# Altium PCB imu-extend.PcbDoc
Units mm, origin at the board's own origin, x right, y up, seen from the top; angles counter-clockwise.
Board outline 16 x 16 mm, 2 copper layers (Top Layer, Bottom Layer); 2 components, 10 nets, 20 pads, 1 vias.
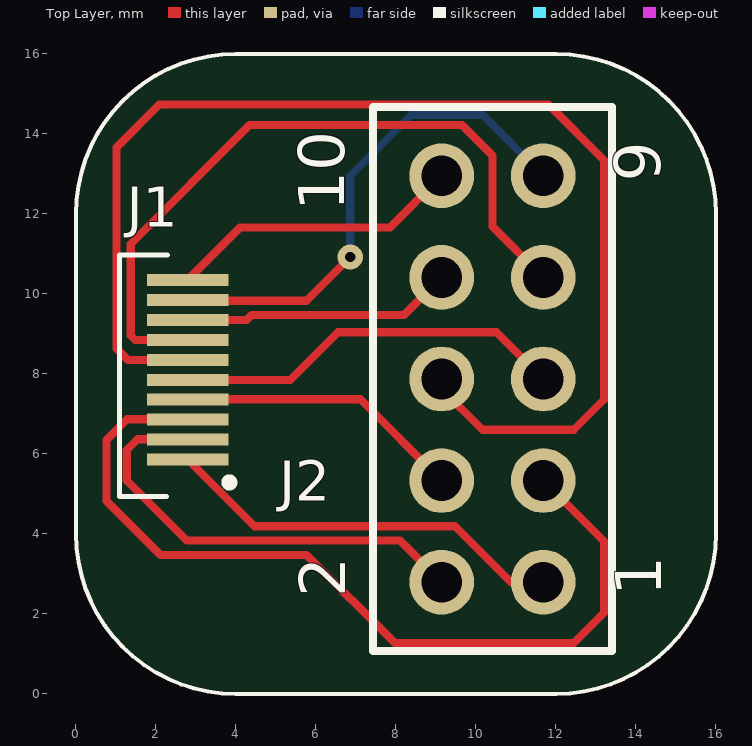
[diagram p0: Top Layer view]
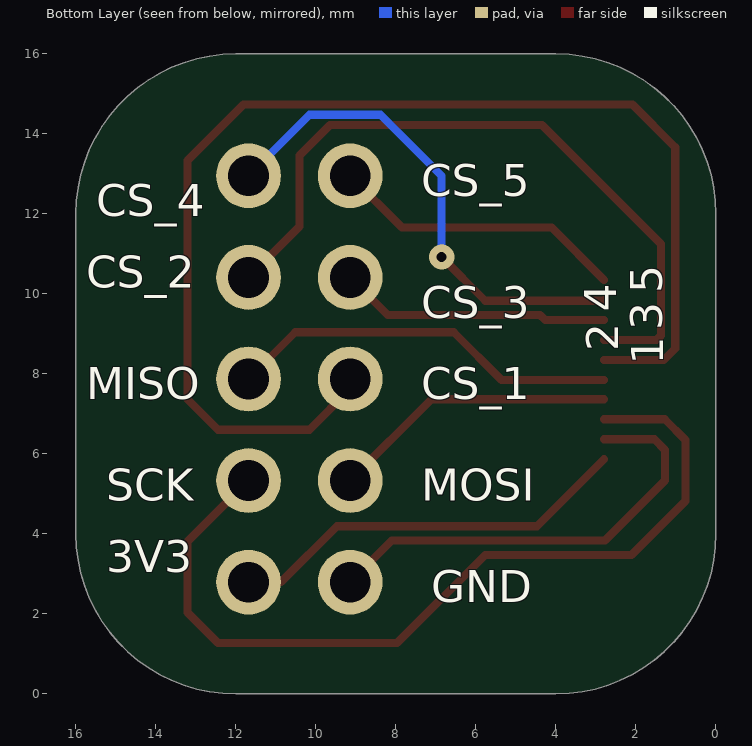
[diagram p1: Bottom Layer view, seen from below]

## Layer stack, top to bottom
Top Solder: solder mask 0.0102, Solder Resist, Dk 3.5
Top Layer: signal copper 0.0356
Dielectric 1: dielectric 0.32, FR-4, Dk 4.8
Bottom Layer: signal copper 0.0356
Bottom Solder: solder mask 0.0102, Solder Resist, Dk 3.5

## Board outline
4,0 cw(c4,4) 0,4 0,12 cw(c4,12) 4,16 12,16 cw(c12,12) 16,12 16,4 cw(c12,4) 12,0

## Design rules (kind name [scope] priority, off if disabled: settings)
Clearance [All] p1: gap=0.254 ignorepadtopadclearanceinfootprint=FALSE except(0: Arc-Hole Track-Hole SMDPad-Hole THPad-Hole Via-Hole Fill-Hole Poly-Hole Region-Hole Text-Hole; 0.127: Arc-SMDPad Track-SMDPad SMDPad-SMDPad; 0.152: Arc-Arc Arc-Track Track-Track; 0.2: Arc-THPad Track-THPad; 0.54: SMDPad-THPad)
HoleSize [All] p1: absolutevalues=TRUE maxlimit=6.3 minlimit=0.2 maxpercent=80.000 minpercent=20.000
HoleToHoleClearance [All] p1: gap=0.54 allowstackedmicrovias=TRUE
MinimumAnnularRing [All] p1: minimumring=0.15
MinimumSolderMaskSliver [All] p1: minsoldermaskwidth=0.1
PolygonConnect [All] p1: connectstyle=Relief reliefconductorwidth=0.254 reliefentries=4 polygonreliefangle="90 Angle" airgapwidth=0.254
RoutingVias [All] p1: holewidth=0.254 width=0.635 viastyle="Through Hole" minholewidth=0.2 minwidth=0.45 maxholewidth=0.711 maxwidth=1.27
SilkToSilkClearance [All] p1: silktosilkclearance=0.15
SilkToSolderMaskClearance [IsPad] p1: minsilkscreentomaskgap=0.127 clearancetoexposedcopper=TRUE
SolderMaskExpansion [All] p1: expansion=0.05
UnRoutedNet [All] p1: checkbadconnections=TRUE
Width [All] p1: maxlimit=0.254 minlimit=0.203 preferedwidth=0.203
24 further rules are at their usual default settings.

## Components (designator, comment, footprint, x,y, rotation, side; value= is the part's Value field where it differs from the comment)
J1 "FPC_10_0.5_2" FPC_10_0.5_2 2.794,9.097 r270 top
J2 "SAMTEC-MTSW-105-07-X-D-240J" SAMTEC-MTSW-105-07-X-D-240 10.414,7.874 r90 top

## Footprints (in the part's own frame and the unit in brackets; to place one, negate y for a bottom-side part, rotate by r counter-clockwise, add the part's x,y. Pads: shape width x height; smd on the part's side, far side on the other; paste and mask are expansions set on the pad)
FPC_10_0.5_2 [mm]
  rect 0.3x2.032 smd mask+0.102: 1(3.231,0) 2(2.731,0) 3(2.231,0) 4(1.731,0) 5(1.25,0) 6(0.75,0) 7(0.25,0) 8(-0.25,0) 9(-0.75,0) 10(-1.25,0)
  silkscreen extent -1.88,-1.7 4.17,1.14
SAMTEC-MTSW-105-07-X-D-240 [mm]
  round 1.62 hole 1.02 mask+0.11: 1(-5.08,-1.27) 2(-5.08,1.27) 3(-2.54,-1.27) 4(-2.54,1.27) 5(0,-1.27) 6(0,1.27) 7(2.54,-1.27) 8(2.54,1.27) 9(5.08,-1.27) 10(5.08,1.27)
  silkscreen extent -6.8,-2.99 6.8,2.99, body extent -6.43,-2.46 6.27,2.62, height 8.64

## Part data
J1: "10 Position FPC Connector Contacts, Bottom 0.020 (0.50mm) Surface Mount, Right Angle", Package=None, Availability=Unavailable, MF="TE Connectivity", MP=1734592-6, Price=None, SnapEDA_Link=https://www.snapeda.com/parts/1734592-6/TE%20Connectivity/view-part/4788517/?ref=snap
J2: "5x2 male connector (2.54mm)"

## Via types
v1: diameter 0.635, hole 0.254, Top Layer to Bottom Layer, 1 vias

## Nets (pads, with @x,y where several pads share a name; then routed paths per layer and width w, separated by ;. In a path a pad name is that pad's centre, name@x,y a point inside that pad or via, vN(x,y) a via of type N, cw(c..) or ccw(c..) an arc to the next point about the centre after c; other vN are vias at no path point)
3V3: J1.1 J2.1 | length 10.2
  Top Layer w0.203: J1.1 4.469,4.191 9.474,4.191 10.871,2.794 J2.1
CS_1: J1.6 J2.6 | length 31.2
  Top Layer w0.203: J1.6 1.305,8.347 1.016,8.636 1.016,13.665 2.083,14.732 11.811,14.732 13.208,13.335 13.208,7.366 12.446,6.604 10.16,6.604 9.144,7.62 J2.6
CS_2: J1.7 J2.7 | length 17.9
  Top Layer w0.203: J1.7 1.484,8.847 1.372,8.96 1.372,11.252 4.343,14.224 9.652,14.224 10.414,13.462 10.414,11.684 J2.7
CS_3: J1.8 J2.8 | length 6.8
  Top Layer w0.203: J1.8 4.267,9.347 4.394,9.474 8.204,9.474 J2.8
CS_4: J1.9 J2.9 | length 12.6
  Top Layer w0.203: J1.9 2.811,9.83 5.766,9.83 v1(6.858,10.922)
  Bottom Layer w0.203: v1(6.858,10.922) 6.858,12.954 8.382,14.478 10.16,14.478 J2.9
CS_5: J1.10 J2.10 | length 7.4
  Top Layer w0.203: J1.10 4.105,11.659 7.849,11.659 J2.10
GND: J1.2 J2.2 | length 11.3
  Top Layer w0.203: J1.2 1.535,6.366 1.27,6.101 1.27,5.334 2.771,3.833 8.105,3.833 J2.2
MISO: J1.5 J2.5 | length 9.9
  Top Layer w0.203: J1.5 5.359,7.847 6.555,9.042 10.516,9.042 J2.5
MOSI: J1.4 J2.4 | length 7.2
  Top Layer w0.203: J1.4 7.112,7.366 J2.4
SCK: J1.3 J2.3 | length 21.9
  Top Layer w0.203: J1.3 1.278,6.866 0.762,6.35 0.762,4.826 2.11,3.478 5.768,3.478 7.976,1.27 12.446,1.27 13.208,2.032 13.208,3.81 J2.3

## Silkscreen, mask and mechanical layers (free items; w line width, h text height)
Top Overlay:
  the board outline again, w0.1
Bottom Overlay:
  text "CS_5" at 7.366,12.446 h0.8
  text "CS_4" at 15.494,11.938 h0.8
  text "CS_2" at 15.748,10.16 h0.8
  text "CS_3" at 7.366,9.398 h0.8
  text "CS_1" at 7.366,7.366 h0.8
  text "MISO" at 15.748,7.366 h0.8
  text "MOSI" at 7.366,4.826 h0.8
  text "SCK" at 15.24,4.826 h0.8
  text "3V3" at 15.24,3.048 h0.8
  text "GND" at 7.112,2.286 h0.8
Mechanical 10:
  the board outline again, w0.013

## Text inside footprints (layer, text, board x,y; h text height)
J1: Bottom Overlay "2" at 2.438,8.564 h0.8 r270; Bottom Overlay "1" at 1.321,8.234 h0.8 r270; Bottom Overlay "3" at 1.346,9.097 h0.8 r270; Bottom Overlay "4" at 2.489,9.554 h0.8 r270; Bottom Overlay "5" at 1.346,10.012 h0.8 r270
J2: Top Overlay "10" at 7.087,12.065 h1.97 r90; Top Overlay "9" at 14.986,12.802 h1.97 r90; Top Overlay "2" at 7.112,2.413 h1.97 r90; Top Overlay "1" at 15.011,2.438 h1.97 r90; Mechanical 40 "10.160" at 5.461,7.074 h0.39 r90; Mechanical 40 "12.700" at 14.816,7.074 h0.39 r90; Mechanical 40 "2.540" at 6.477,0.165 h0.39 r90; Mechanical 40 "2.540" at 10.541,-1.93 h0.39 r90; Mechanical 40 "5.080" at 10.541,-3.835 h0.39 r90; Mechanical 16 "10" at 7.087,12.065 h1.97 r90; Mechanical 16 "9" at 14.986,12.802 h1.97 r90; Mechanical 16 "2" at 7.112,2.413 h1.97 r90; Mechanical 16 "1" at 15.011,2.438 h1.97 r90